# EAGLE board Headlight PCB (EAGLE 9.1.3)
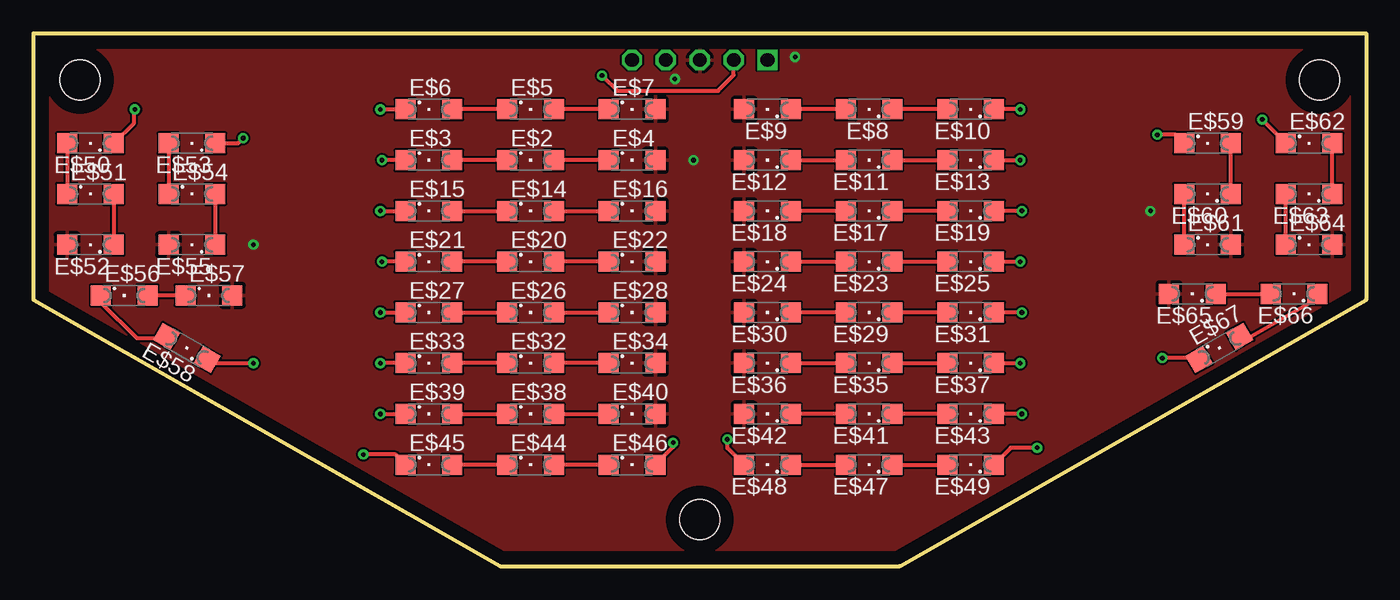
[diagram p0: board, top side]
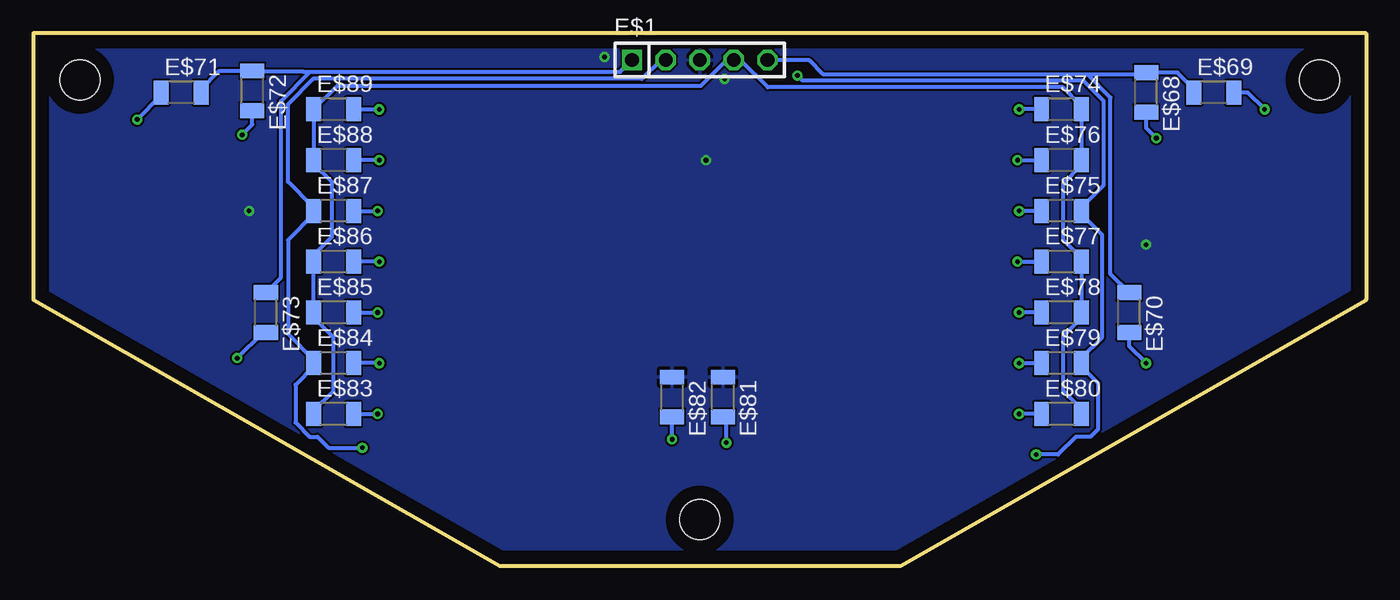
[diagram p1: board, bottom side, seen from below]

Size 100 x 40 mm. Coordinates in mm from the lower left corner, seen from the top.
Outline: 0,40 100,40 100,20 65,0 35,0 0,20 0,40
Copper layers (1*16): Top 0.035mm / dielectric 1.5mm / Bottom 0.035mm
Design rules "default": minimum track width 6mil, minimum drill 0.35mm, track to track 6mil, track to pad 6mil, pad to pad 6mil, via to via 6mil, smd to smd 6mil, copper to edge 40mil, drill to drill 6mil, minimum pad ring 10mil, minimum via ring 8mil, stop-mask expansion 4mil, vias tented up to drill 0mil, thermal gap 10mil
Holes 3 mm at 50,3.5 3.5,36.5 96.5,36.5

## Footprints (pad centres in the part's own frame; a part is rotated, then mirrored left to right if it is on the bottom)
1X05 = drill 1.016 square: 1 -5.08,0 | drill 1.016 octagon: 2 -2.54,0; 3 0,0; 4 2.54,0; 5 5.08,0
SML1206 = smd 1.5 x 1.5: A 1.75,0; C -1.75,0
R1206 = smd 1.12 x 1.8: 1 -1.49,0; 2 1.49,0

## Placement (x,y rotation side)
E$1  [1X05]  50,38 0 bottom
E$2  [SML1206]  37.3,30.48 0 top
E$3  [SML1206]  29.68,30.48 0 top
E$4  [SML1206]  44.92,30.48 0 top
E$5  [SML1206]  37.3,34.29 0 top
E$6  [SML1206]  29.68,34.29 0 top
E$7  [SML1206]  44.92,34.29 0 top
E$8  [SML1206]  62.7,34.29 180 top
E$9  [SML1206]  55.08,34.29 180 top
E$10  [SML1206]  70.32,34.29 180 top
E$11  [SML1206]  62.7,30.48 180 top
E$12  [SML1206]  55.08,30.48 180 top
E$13  [SML1206]  70.32,30.48 180 top
E$14  [SML1206]  37.3,26.67 0 top
E$15  [SML1206]  29.68,26.67 0 top
E$16  [SML1206]  44.92,26.67 0 top
E$17  [SML1206]  62.7,26.67 180 top
E$18  [SML1206]  55.08,26.67 180 top
E$19  [SML1206]  70.32,26.67 180 top
E$20  [SML1206]  37.3,22.86 0 top
E$21  [SML1206]  29.68,22.86 0 top
E$22  [SML1206]  44.92,22.86 0 top
E$23  [SML1206]  62.7,22.86 180 top
E$24  [SML1206]  55.08,22.86 180 top
E$25  [SML1206]  70.32,22.86 180 top
E$26  [SML1206]  37.3,19.05 0 top
E$27  [SML1206]  29.68,19.05 0 top
E$28  [SML1206]  44.92,19.05 0 top
E$29  [SML1206]  62.7,19.05 180 top
E$30  [SML1206]  55.08,19.05 180 top
E$31  [SML1206]  70.32,19.05 180 top
E$32  [SML1206]  37.3,15.24 0 top
E$33  [SML1206]  29.68,15.24 0 top
E$34  [SML1206]  44.92,15.24 0 top
E$35  [SML1206]  62.7,15.24 180 top
E$36  [SML1206]  55.08,15.24 180 top
E$37  [SML1206]  70.32,15.24 180 top
E$38  [SML1206]  37.3,11.43 0 top
E$39  [SML1206]  29.68,11.43 0 top
E$40  [SML1206]  44.92,11.43 0 top
E$41  [SML1206]  62.7,11.43 180 top
E$42  [SML1206]  55.08,11.43 180 top
E$43  [SML1206]  70.32,11.43 180 top
E$44  [SML1206]  37.3,7.62 0 top
E$45  [SML1206]  29.68,7.62 0 top
E$46  [SML1206]  44.92,7.62 0 top
E$47  [SML1206]  62.7,7.62 180 top
E$48  [SML1206]  55.08,7.62 180 top
E$49  [SML1206]  70.32,7.62 180 top
E$50  [SML1206]  4.28,31.75 180 top
E$51  [SML1206]  4.28,27.94 0 top
E$52  [SML1206]  4.28,24.13 180 top
E$53  [SML1206]  11.9,31.75 180 top
E$54  [SML1206]  11.9,27.94 0 top
E$55  [SML1206]  11.9,24.13 180 top
E$56  [SML1206]  6.82,20.32 0 top
E$57  [SML1206]  13.17,20.32 0 top
E$58  [SML1206]  11.52,16.38 150.3 top
E$59  [SML1206]  88.1,31.75 0 top
E$60  [SML1206]  88.1,27.94 180 top
E$61  [SML1206]  88.1,24.13 0 top
E$62  [SML1206]  95.72,31.75 0 top
E$63  [SML1206]  95.72,27.94 180 top
E$64  [SML1206]  95.72,24.13 0 top
E$65  [SML1206]  86.96,20.45 180 top
E$66  [SML1206]  94.58,20.45 180 top
E$67  [SML1206]  88.99,16.38 29.7 top
E$68  [R1206]  16.51,35.56 270 bottom
E$69  [R1206]  11.43,35.56 0 bottom
E$70  [R1206]  17.78,19.05 270 bottom
E$71  [R1206]  88.9,35.56 0 bottom
E$72  [R1206]  83.57,35.69 270 bottom
E$73  [R1206]  82.55,19.05 270 bottom
E$74  [R1206]  22.86,34.29 0 bottom
E$75  [R1206]  22.86,26.67 0 bottom
E$76  [R1206]  22.86,30.48 0 bottom
E$77  [R1206]  22.86,22.86 0 bottom
E$78  [R1206]  22.86,19.05 0 bottom
E$79  [R1206]  22.86,15.24 0 bottom
E$80  [R1206]  22.86,11.43 0 bottom
E$81  [R1206]  48.26,12.7 270 bottom
E$82  [R1206]  52.07,12.7 270 bottom
E$83  [R1206]  77.47,11.43 0 bottom
E$84  [R1206]  77.47,15.24 0 bottom
E$85  [R1206]  77.47,19.05 0 bottom
E$86  [R1206]  77.47,22.86 0 bottom
E$87  [R1206]  77.47,26.67 0 bottom
E$88  [R1206]  77.47,30.48 0 bottom
E$89  [R1206]  77.47,34.29 0 bottom

## Library data of the parts
E$1 = female headers
E$2-E$67 = led
E$68-E$89 = smd-ipc

## Nets
S$1: E$51.A E$52.C
S$2: E$50.A E$51.C
S$3: E$50.C E$69.2
S$5: E$54.A E$55.C
S$6: E$53.A E$54.C
S$7: E$56.A E$57.C
S$8: E$56.C E$58.A
S$9: E$58.C E$70.2
S$10: E$53.C E$68.2
S$11: E$5.A E$7.C
S$12: E$5.C E$6.A
S$13: E$2.A E$4.C
S$14: E$2.C E$3.A
S$15: E$14.C E$15.A
S$16: E$14.A E$16.C
S$17: E$20.A E$22.C
S$18: E$20.C E$21.A
S$19: E$26.C E$27.A
S$20: E$26.A E$28.C
S$21: E$32.A E$34.C
S$22: E$32.C E$33.A
S$23: E$38.C E$39.A
S$24: E$38.A E$40.C
S$25: E$44.A E$46.C
S$26: E$44.C E$45.A
S$27: E$47.A E$48.C
S$28: E$41.A E$42.C
S$29: E$35.A E$36.C
S$30: E$29.A E$30.C
S$31: E$23.A E$24.C
S$32: E$17.A E$18.C
S$33: E$11.A E$12.C
S$34: E$8.A E$9.C
S$35: E$8.C E$10.A
S$36: E$11.C E$13.A
S$37: E$17.C E$19.A
S$38: E$23.C E$25.A
S$39: E$29.C E$31.A
S$40: E$35.C E$37.A
S$41: E$41.C E$43.A
S$42: E$47.C E$49.A
S$43: E$6.C E$74.1
S$44: E$3.C E$76.1
S$45: E$15.C E$75.1
S$46: E$21.C E$77.1
S$47: E$27.C E$78.1
S$49: E$33.C E$79.1
S$50: E$39.C E$80.1
S$51: E$46.A E$81.2
S$52: E$48.A E$82.2
S$53: E$1.1 E$71.2 E$72.1 E$73.1
S$54: E$63.A E$64.C
S$55: E$10.C E$89.2
S$56: E$13.C E$88.2
S$57: E$19.C E$87.2
S$58: E$25.C E$86.2
S$59: E$31.C E$85.2
S$60: E$37.C E$84.2
S$61: E$43.C E$83.2
S$62: E$62.A E$63.C
S$63: E$1.2 E$45.C E$49.C E$75.2 E$79.2 E$84.1 E$87.1
S$64: E$62.C E$71.1
S$66: E$59.C E$72.2
S$67: E$59.A E$60.C
S$68: E$60.A E$61.C
S$69: E$65.C E$66.A
S$70: E$66.C E$67.A
S$71: E$67.C E$73.2
S$72: E$1.5 E$68.1 E$69.1 E$70.1
S$76: E$1.4 E$74.2 E$76.2 E$77.2 E$78.2 E$80.2 E$83.1 E$85.1 E$86.1 E$88.1 E$89.1
VCC: E$1.3 E$4.A E$7.A E$9.A E$12.A E$16.A E$18.A E$22.A E$24.A E$28.A E$30.A E$34.A E$36.A E$40.A E$42.A E$52.A E$55.A E$57.A E$61.A E$64.A E$65.A E$81.1 E$82.1

## Tracks (layer width: path | path; a pad name or v marks a point on that pad's centre or on a via)
S$1
  Top 0.3: E$51.A E$52.C
S$2
  Top 0.3: E$50.A E$51.C
S$3  (via drill 0.35)
  Top 0.3: v7.62,34.29 7.55,34.22 7.55,33.27 E$50.C
  Bottom 0.3: v7.62,34.29 8.89,35.56 E$69.2
S$5
  Top 0.3: E$54.A E$55.C
S$6
  Top 0.3: E$53.A E$54.C
S$7
  Top 0.3: E$57.C E$56.A
S$8
  Top 0.3: E$58.A 9.87,17.12 7.76,17.12 5.07,19.81 E$56.C
S$9  (via drill 0.35)
  Top 0.3: E$58.C 13.31,15.24 v16.51,15.24
  Bottom 0.3: v16.51,15.24 17.78,16.51 E$70.2
S$10  (via drill 0.35)
  Top 0.3: E$53.C 15.37,31.75 v15.75,32.13
  Bottom 0.3: v15.75,32.13 16.51,32.89 E$68.2
S$11
  Top 0.3: E$7.C E$5.A
S$12
  Top 0.3: E$5.C E$6.A
S$13
  Top 0.3: E$4.C E$2.A
S$14
  Top 0.3: E$2.C E$3.A
S$15
  Top 0.3: E$15.A E$14.C
S$16
  Top 0.3: E$14.A E$16.C
S$17
  Top 0.3: E$22.C E$20.A
S$18
  Top 0.3: E$20.C E$21.A
S$19
  Top 0.3: E$27.A E$26.C
S$20
  Top 0.3: E$26.A E$28.C | E$28.C
S$21
  Top 0.3: E$34.C E$32.A
S$22
  Top 0.3: E$32.C E$33.A
S$23
  Top 0.3: E$39.A E$38.C
S$24
  Top 0.3: E$38.A E$40.C
S$25
  Top 0.3: E$46.C E$44.A
S$26
  Top 0.3: E$44.C E$45.A
S$27
  Top 0.3: E$48.C E$47.A
S$28
  Top 0.3: E$41.A E$42.C
S$29
  Top 0.3: E$36.C E$35.A
S$30
  Top 0.3: E$29.A E$30.C
S$31
  Top 0.3: E$24.C E$23.A | E$23.A
S$32
  Top 0.3: E$17.A E$18.C
S$33
  Top 0.3: E$12.C E$11.A
S$34
  Top 0.3: E$8.A E$9.C
S$35
  Top 0.3: E$10.A E$8.C
S$36
  Top 0.3: E$11.C E$13.A
S$37
  Top 0.3: E$19.A E$17.C
S$38
  Top 0.3: E$23.C E$25.A
S$39
  Top 0.3: E$31.A E$29.C
S$40
  Top 0.3: E$35.C E$37.A
S$41
  Top 0.3: E$43.A E$41.C
S$42
  Top 0.3: E$47.C E$49.A
S$43  (via drill 0.35)
  Top 0.3: v26.04,34.29 E$6.C
  Bottom 0.3: E$74.1 v26.04,34.29
S$44  (via drill 0.35)
  Top 0.3: E$3.C v26.16,30.48
  Bottom 0.3: v26.16,30.48 E$76.1
S$45  (via drill 0.35)
  Top 0.3: v26.04,26.67 E$15.C
  Bottom 0.3: E$75.1 v26.04,26.67
S$46  (via drill 0.35)
  Top 0.3: E$21.C v26.16,22.86
  Bottom 0.3: v26.16,22.86 E$77.1
S$47  (via drill 0.35)
  Top 0.3: v26.04,19.05 E$27.C
  Bottom 0.3: E$78.1 v26.04,19.05
S$49  (via drill 0.35)
  Top 0.3: E$33.C v26.04,15.24
  Bottom 0.3: v26.04,15.24 E$79.1
S$50  (via drill 0.35)
  Top 0.3: v26.04,11.43 E$39.C
  Bottom 0.3: E$80.1 v26.04,11.43
S$51  (via drill 0.35)
  Top 0.3: E$46.A 48.01,8.96 v48.01,9.27
  Bottom 0.3: v48.01,9.27 48.01,10.96 E$81.2
S$52  (via drill 0.35)
  Top 0.3: E$48.A 52.07,8.88 v52.07,9.53
  Bottom 0.3: v52.07,9.53 E$82.2
S$53
  Bottom 0.3: E$71.2 87.41,35.81 86.05,37.18 E$72.1 83.5,37.11 79.73,37.11 79.22,37.11 | 79.22,37.11 81.41,34.92 81.41,21.68 E$73.1 | E$1.1 55.97,37.11 79.22,37.11
S$54
  Top 0.3: E$64.C E$63.A
S$55  (via drill 0.35)
  Top 0.3: v74.04,34.29 E$10.C
  Bottom 0.3: E$89.2 v74.04,34.29
S$56  (via drill 0.35)
  Top 0.3: E$13.C v74.04,30.48
  Bottom 0.3: v74.04,30.48 E$88.2
S$57  (via drill 0.35)
  Top 0.3: v74.17,26.67 E$19.C
  Bottom 0.3: E$87.2 v74.17,26.67
S$58  (via drill 0.35)
  Top 0.3: E$25.C v74.04,22.86
  Bottom 0.3: v74.04,22.86 E$86.2
S$59  (via drill 0.35)
  Top 0.3: v74.17,19.05 E$31.C
  Bottom 0.3: E$85.2 v74.17,19.05
S$60  (via drill 0.35)
  Top 0.3: E$37.C v74.04,15.24
  Bottom 0.3: v74.04,15.24 E$84.2
S$61  (via drill 0.35)
  Top 0.3: v74.17,11.43 E$43.C
  Bottom 0.3: E$83.2 v74.17,11.43
S$62
  Top 0.3: E$63.C E$62.A
S$63  (via drill 0.35)
  Top 0.3: E$49.C 73.34,8.89 v75.31,8.89 | E$45.C 27.17,8.38 v24.77,8.38 | v42.67,36.83 43.81,35.69 51.37,35.69 52.54,36.86 E$1.2
  Bottom 0.3: v24.77,8.38 23.11,8.38 21.78,9.72 20.68,9.72 20.13,10.28 20.13,13.74 21.37,14.99 E$79.2 21.37,15.62 19.81,17.18 19.81,24.86 21.37,26.42 E$75.2 21.37,26.92 19.68,28.61 19.68,34.92 21.21,36.45 42.29,36.45 v42.67,36.83 | v75.31,8.89 77.85,8.89 78.68,9.72 79.26,9.72 80.33,10.79 80.33,13.62 78.96,14.99 E$84.1 78.96,15.49 80.9,17.43 80.9,24.48 78.96,26.42 E$87.1 78.96,26.92 80.9,28.86 80.9,34.67 78.99,36.58 54.34,36.58 52.92,38 E$1.2
S$64  (via drill 0.35)
  Top 0.3: E$62.C 92.2,33.52 v92.2,33.53
  Bottom 0.3: v92.2,33.53 90.39,35.34 E$71.1
S$66  (via drill 0.35)
  Top 0.3: v84.33,32.38 85.72,32.38 E$59.C
  Bottom 0.3: v84.33,32.38 83.57,33.15 E$72.2
S$67
  Top 0.3: E$60.C E$59.A
S$68
  Top 0.3: E$61.C E$60.A
S$69
  Top 0.3: E$65.C E$66.A
S$70
  Top 0.3: E$66.C 96.33,20.09 90.82,16.94 E$67.A
S$71  (via drill 0.35)
  Top 0.3: E$67.C 87.36,15.62 v84.71,15.62
  Bottom 0.3: v84.71,15.62 82.77,17.56 E$73.2
S$72
  Bottom 0.3: E$70.1 19.18,21.94 19.18,35.18 20.9,36.9 21.59,36.9 | E$69.1 12.92,35.81 14.16,37.05 E$68.1 16.66,36.9 21.59,36.9 | 21.59,36.9 40.71,36.9 41.78,37.97 44.89,37.97 E$1.5
S$76
  Bottom 0.3: E$74.2 21.37,34.54 | E$74.2 E$76.2 21.37,30.1 22.73,28.74 22.73,24.48 21.37,23.11 E$77.2 E$78.2 21.37,18.64 22.73,17.27 22.73,13.17 21.37,11.81 E$80.2 | E$74.2 21.37,34.54 | 21.37,34.54 22.77,35.94 44.89,35.94 46.95,38 E$1.4 47.98,38 49.91,36.07 77.18,36.07 E$89.1 E$88.1 78.96,30.19 77.6,28.83 77.6,24.73 78.96,23.37 E$86.1 E$85.1 78.96,18.67 77.47,17.18 77.47,13.17 78.96,11.68 E$83.1
VCC  (via drill 0.35)
  other vias: 83.82,26.67 49.53,30.48 57.15,38.23 16.51,24.13 48.13,36.58
  pour Bottom: -1.27,40.64 -1.27,7.62 3.81,2.54 11.43,-5.08 55.88,-5.08 82.55,-5.08 91.44,3.81 106.68,19.05 106.68,22.86 106.68,38.1 101.6,43.18 95.25,43.18 1.27,43.18
  pour Top: -3.81,43.18 -3.81,5.08 -1.27,2.54 10.16,-8.89 40.64,-8.89 95.25,-8.89 105.41,1.27 118.11,13.97 118.11,33.02 118.11,34.29 109.22,43.18

## Text on the board
tText: A | A | A | A | A | A | A | A | A | A | A | A | A | A | A | A | A | A | A | A | A | A | A | A | A | A | A | A | A | A | A | A | A | A | A | A | A | A | A | A | A | A | A | A | A | A | A | A | A | A | A | A | A | A | A | A | A | A | A | A | A | A | A | A | A | A
bText: 5 | 1 | 200 | 200 | 200 | 1: LTS / 2: HL / 3: 12V / 4: HB / 5: RTS | 200 | 200 | 200 | 200 | 200 | RTS | HL & HB | LTS | 200 | 200 | 200 | 200 | 200 | Onboard computer for bicycle / Headlight board / rev1 | 200 | 200 | 200 | 200 | 200 | 200 | 200 | 200 | 200 | 48x white LEDs / 18x orange LEDs / 22x 200 ohm / SMD 1206
200bmp: E:/Silvio/Youtube/Vizualni dio/Logotip/PCB dno logo.bmp | E:/Silvio/Youtube/Vizualni dio/Logotip/PCB dno logo.bmp